# Altium PCB demo_dermis_main_testboard.PcbDoc (part 2 of 7)
Units mm, origin at the board's own origin, x right, y up, seen from the top; angles counter-clockwise.
Board outline 348.67 x 252.79 mm, 4 copper layers (Top Layer, Layer 1, Layer 2, Bottom Layer), stack 0.603 mm thick; 389 components, 231 nets, 2086 pads, 2626 vias.
Unrouted connection lines stored in the file: 34.
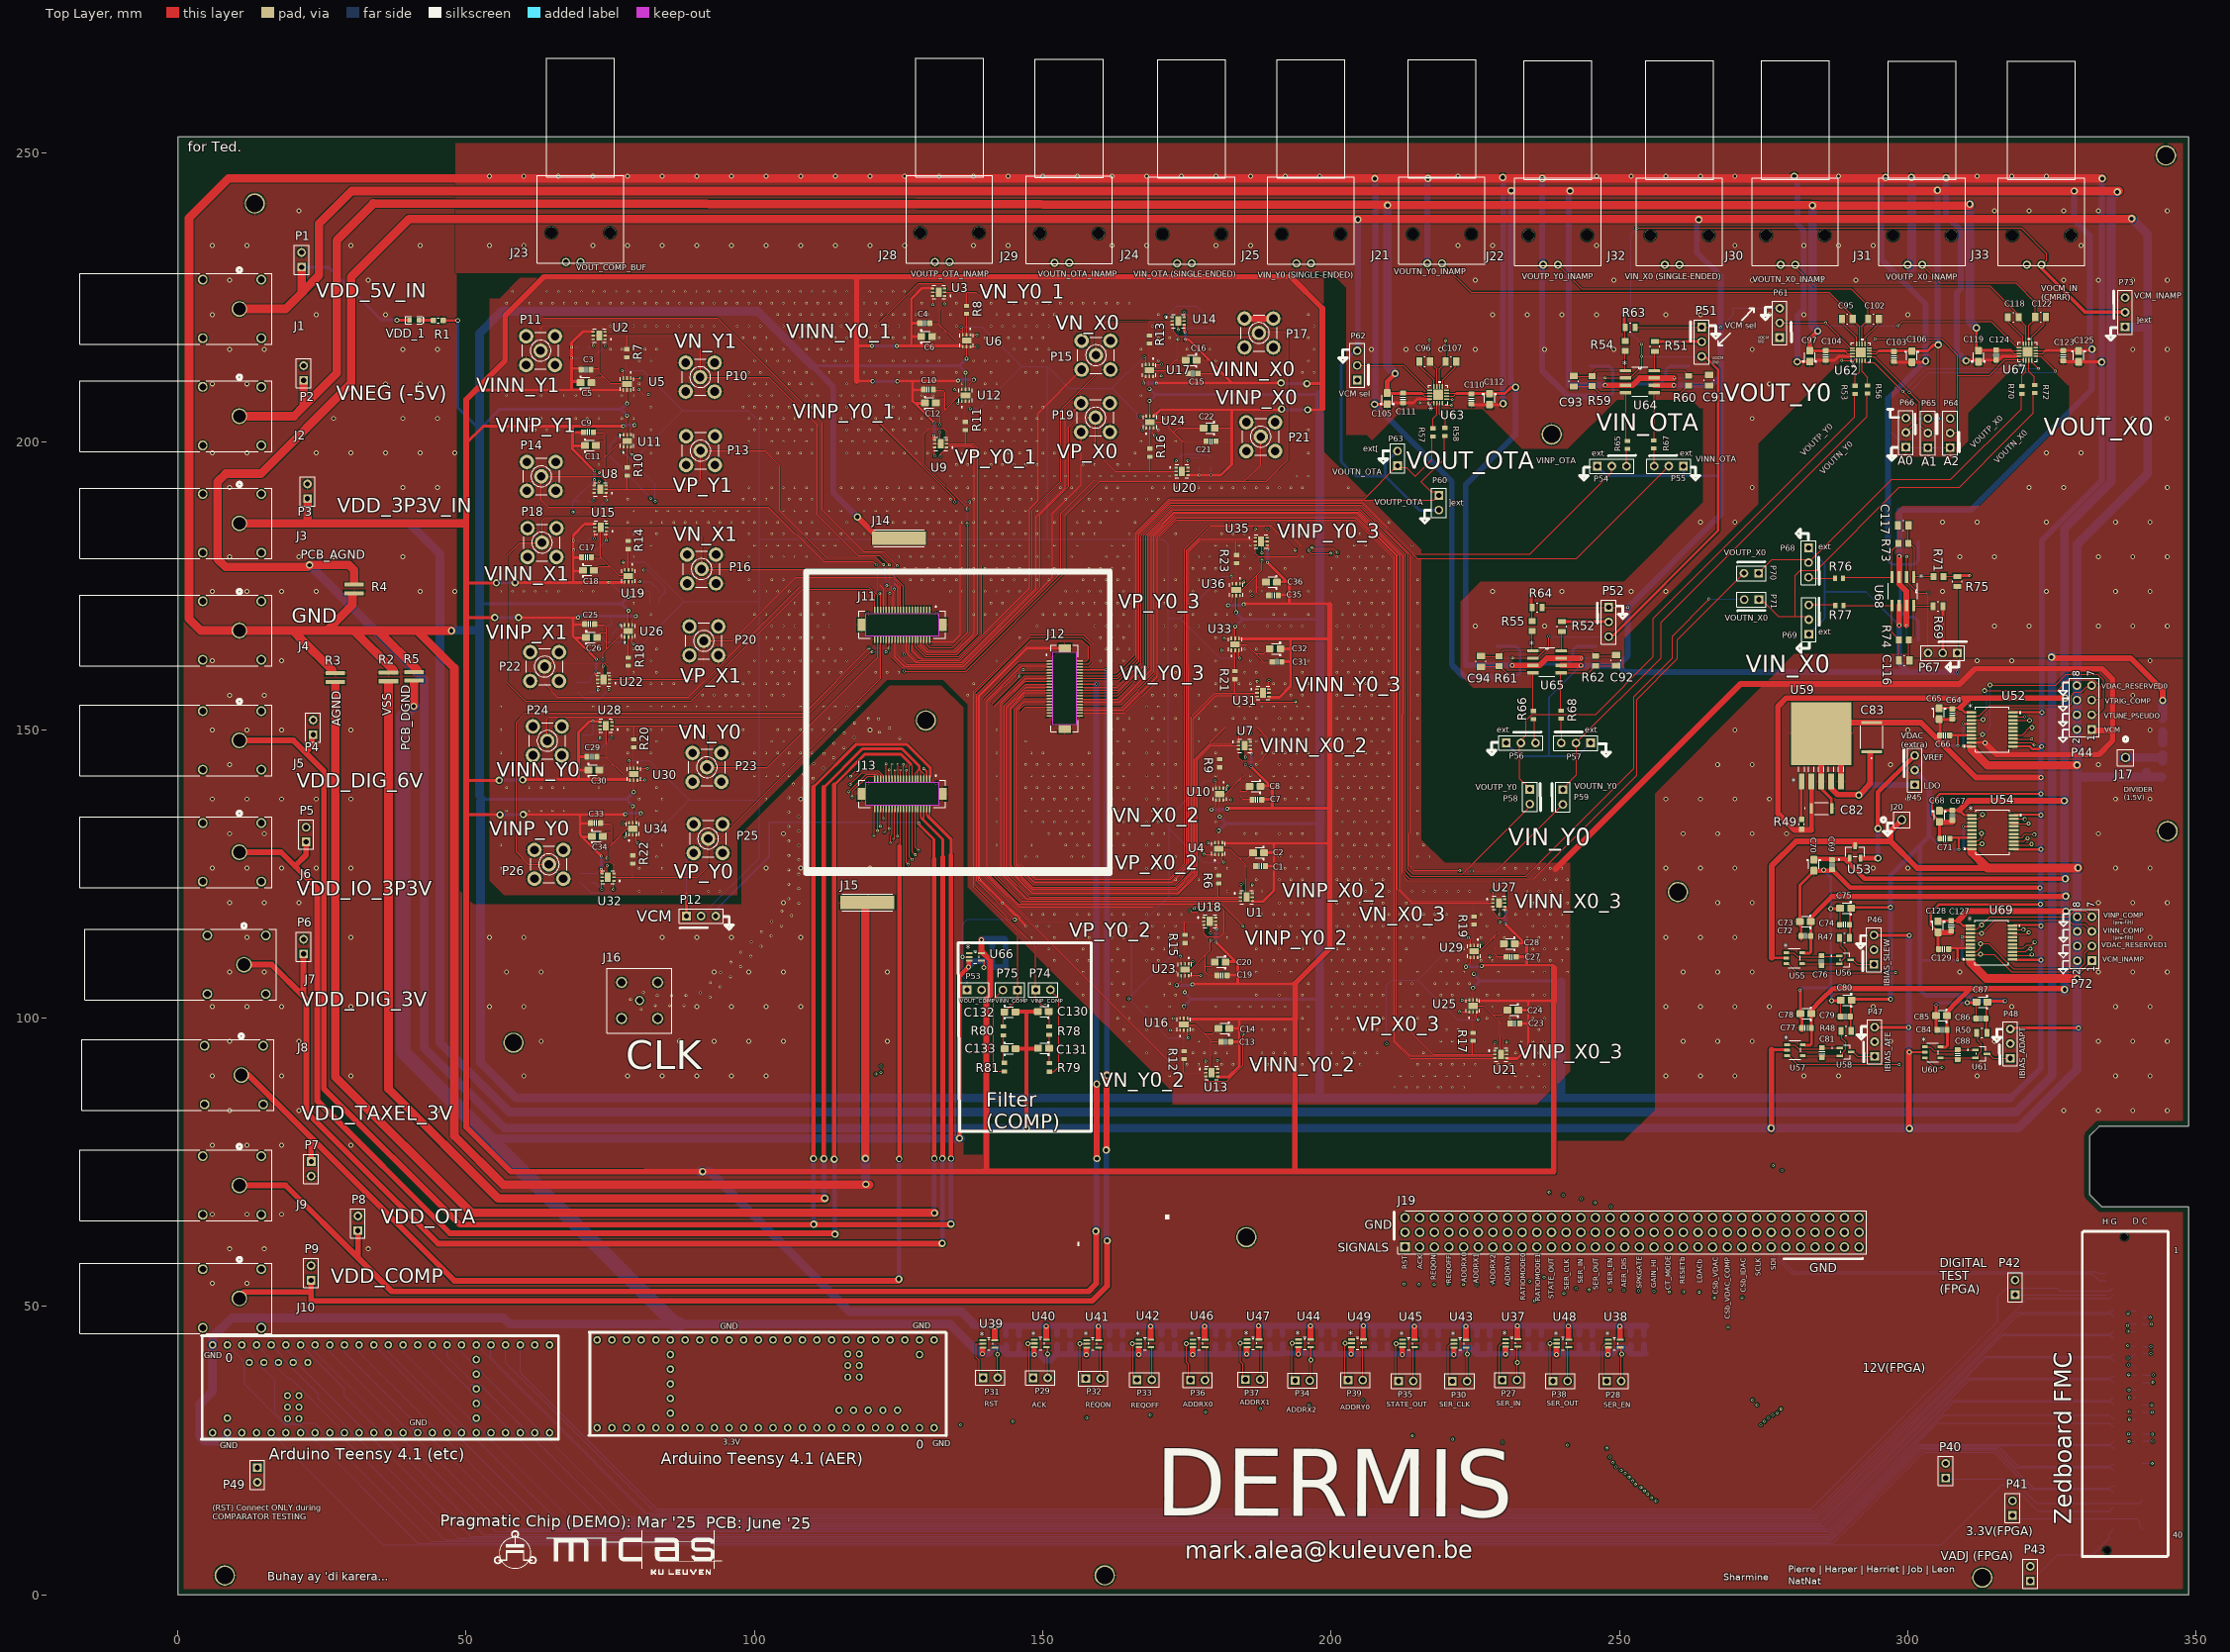
[diagram p0: Top Layer view]

## Via types
v1: diameter 0.4, hole 0.25, Top Layer to Bottom Layer, 1673 vias
v2: diameter 0.85, hole 0.5, Top Layer to Bottom Layer, 416 vias
v3: diameter 0.5, hole 0.3, Top Layer to Bottom Layer, 391 vias
v4: diameter 1.27, hole 0.711, Top Layer to Bottom Layer, 85 vias
v5: diameter 0.7, hole 0.4, Top Layer to Bottom Layer, 57 vias
v6: diameter 1.1, hole 0.7, Top Layer to Bottom Layer, 4 vias

## Nets (pads, with @x,y where several pads share a name; then routed paths per layer and width w, separated by ;. In a path a pad name is that pad's centre, name@x,y a point inside that pad or via, vN(x,y) a via of type N, cw(c..) or ccw(c..) an arc to the next point about the centre after c; other vN are vias at no path point)
A0: P66.2 U62.4 U63.4 U67.4 | length 203.6
  Top Layer w0.2: U63.4@219.307,206.655 219.307,206.376 219.334,206.349 v3@220.812,206.349 ; U62.4@292.584,214.027 292.584,213.747 292.611,213.72 294.088,213.72 299.129,208.68 301.505,206.304 301.505,203.405 P66.2@299.657,201.557 ; U67.4@321.479,214.086 321.479,213.806 v3(322.624,212.662)
  Layer 2 w0.2: v3(220.896,206.249) 243.333,183.812 298.599,183.812 298.672,183.884 298.96,183.884 308.963,173.88 317.168,173.88 321.3,178.013 321.3,182.919 306.113,198.106 306.113,203.992 304.62,205.485 303,205.485 299.925,202.41 299.925,201.825 P66.2@299.657,201.557
  Bottom Layer w0.2: v3(299.112,208.663) 299.221,208.663 303.219,212.662 v3(322.624,212.662)
A1: P65.2 U62.5 U63.5 U67.5 | length 194.9
  Top Layer w0.2: U63.5@220.005,207.353 v3@220.852,207.353 ; U62.5@293.281,214.724 294.129,214.724 302.016,206.837 302.016,202.913 P65.2@303.467,201.462 P65.2@303.467,201.124 ; U67.5@322.177,214.783 323.024,214.783 v3(325.604,212.203)
  Layer 2 w0.2: v3(221,207.261) 221.069,207.261 243.605,184.726 299.47,184.726 309.387,174.808 316.899,174.808 316.958,174.867 316.958,175.053 320.132,178.227 320.132,181.768 305.114,196.785 305.114,199.959 303.611,201.462 P65.2@303.467,201.462
  Bottom Layer w0.2: v3(300.261,208.487) 303.757,211.983 325.385,211.983 v3(325.604,212.203)
A2: P64.2 U62.1 U63.1 U67.1 | length 208.1
  Top Layer w0.2: v3(215.254,206.703) 217.36,206.703 217.592,206.935 217.807,206.72 U63.1@217.807,206.655 ; v3(288.531,214.074) 290.636,214.074 290.868,214.306 291.083,214.091 U62.1@291.083,214.027 ; v3(294.292,217.785) 305.847,217.785 308.611,215.022 308.611,201.73 308.368,201.487 307.338,201.487 P64.2@307.318,201.468 ; 308.679,211.492 314.161,211.492 316.845,214.177 319.952,214.177 319.979,214.15 U67.1@319.979,214.086
  Layer 2 w0.2: v3(215.254,206.703) 238.984,182.973 298.696,182.973 308.189,173.48 318.032,173.48 322.334,177.782 322.334,186.452 P64.2@307.318,201.468
  Bottom Layer w0.2: v3(288.531,214.074) 290.2,214.074 290.432,214.306 290.808,214.306 293.746,217.244 293.749,217.244 v3(294.292,217.785)
ACK: J13.37 J19.4 P29.2 U40.4@150.628,42.948 | length 291.7
  Top Layer w0.15: v3(116.35,139.283) 119.348,142.282 121.062,142.282 121.345,141.999 J13.37@121.345,141.48 ; U40.4@150.628,42.948 150.835,42.948 U40.4@150.838,42.95 ; P29.2@150.838,37.636 U40.4@150.838,42.95 ; v2(150.86,41.795) 150.86,42.762 150.957,42.859 150.851,42.964 U40.4@150.838,42.95
  Layer 1 w0.15: v3(215.205,53.826) 215.271,53.893 215.271,60.25 J19.4@215.344,60.323
  Layer 2 w0.15: v3(116.35,139.283) 116.304,139.238 116.304,96.898 99.341,79.935 99.341,62.301 103.012,58.629 214.172,58.629 J19.4@215.344,59.801 ; v2(150.86,41.795) 162.555,53.49 212.319,53.49 212.432,53.377 214.588,53.377 215.038,53.826 v3(215.205,53.826)